# Altium PCB PCB_Trex.PcbDoc
Units mm, origin at the board's own origin, x right, y up, seen from the top; angles counter-clockwise.
Board outline 107.32 x 64.64 mm, 2 copper layers (Top Layer, Bottom Layer); 10 components, 6 nets, 107 pads, 0 vias.
Unrouted connection lines stored in the file: 19.
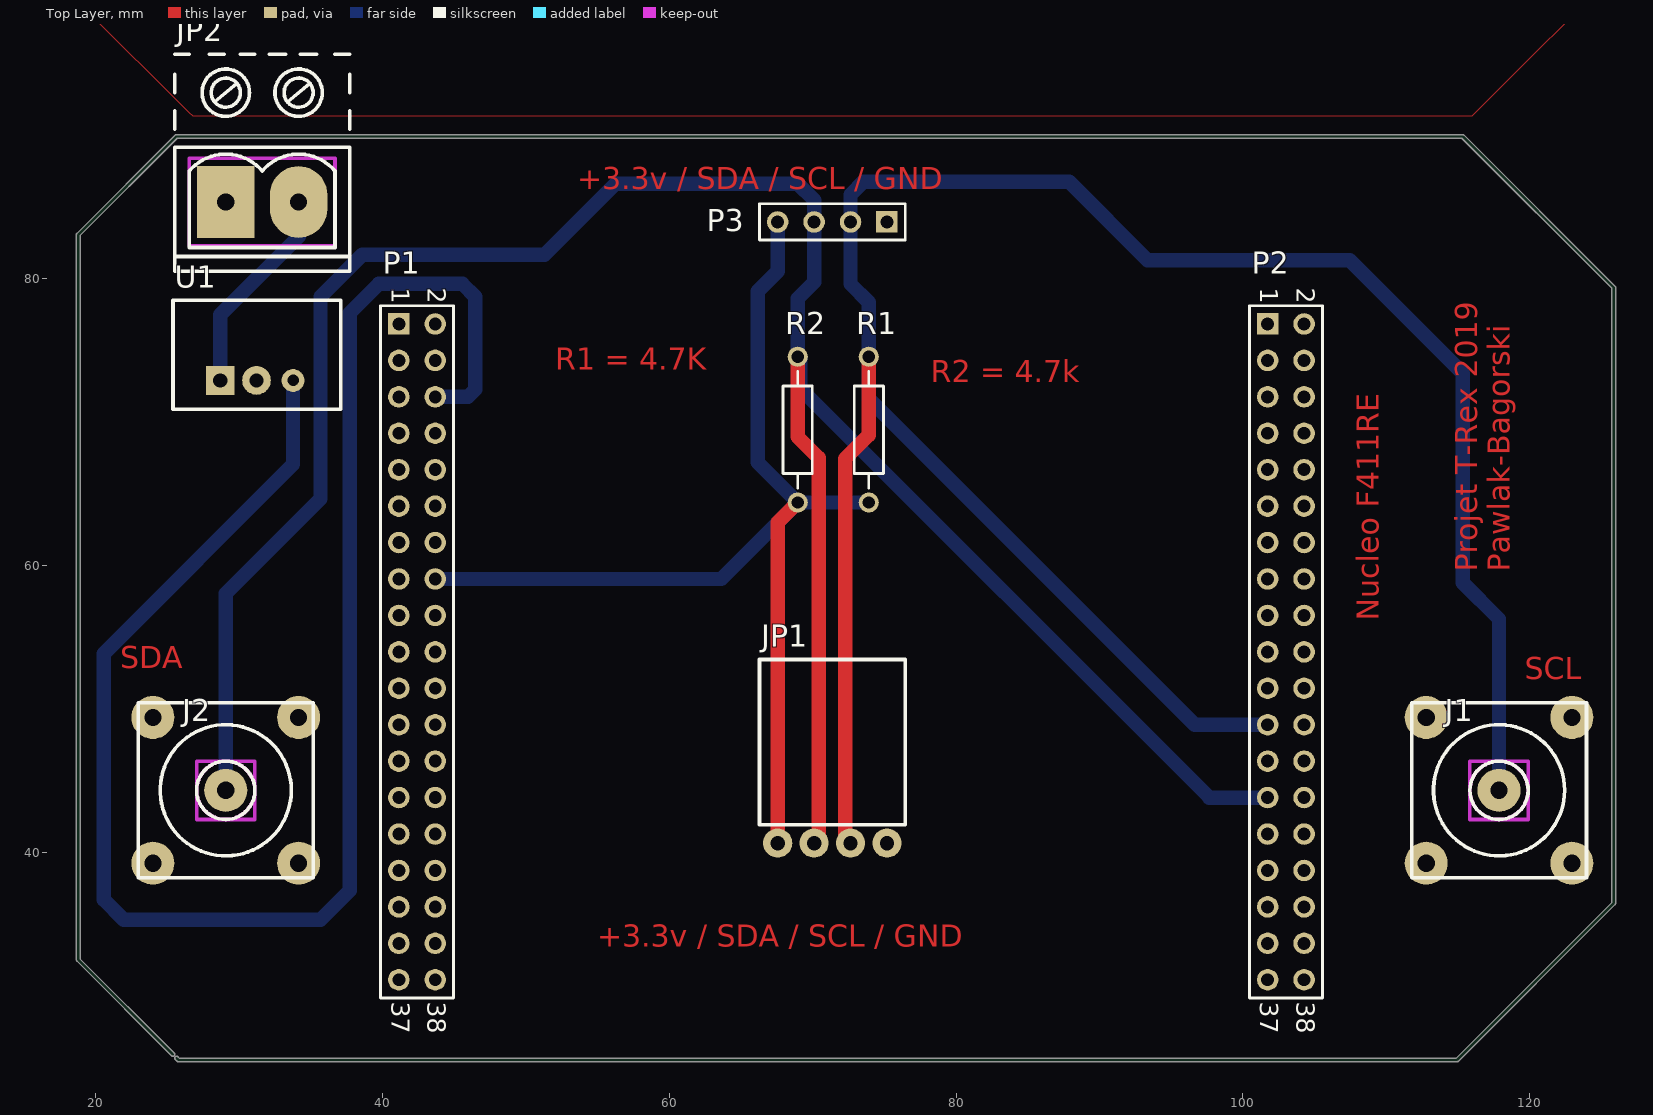
[diagram p0: Top Layer view]
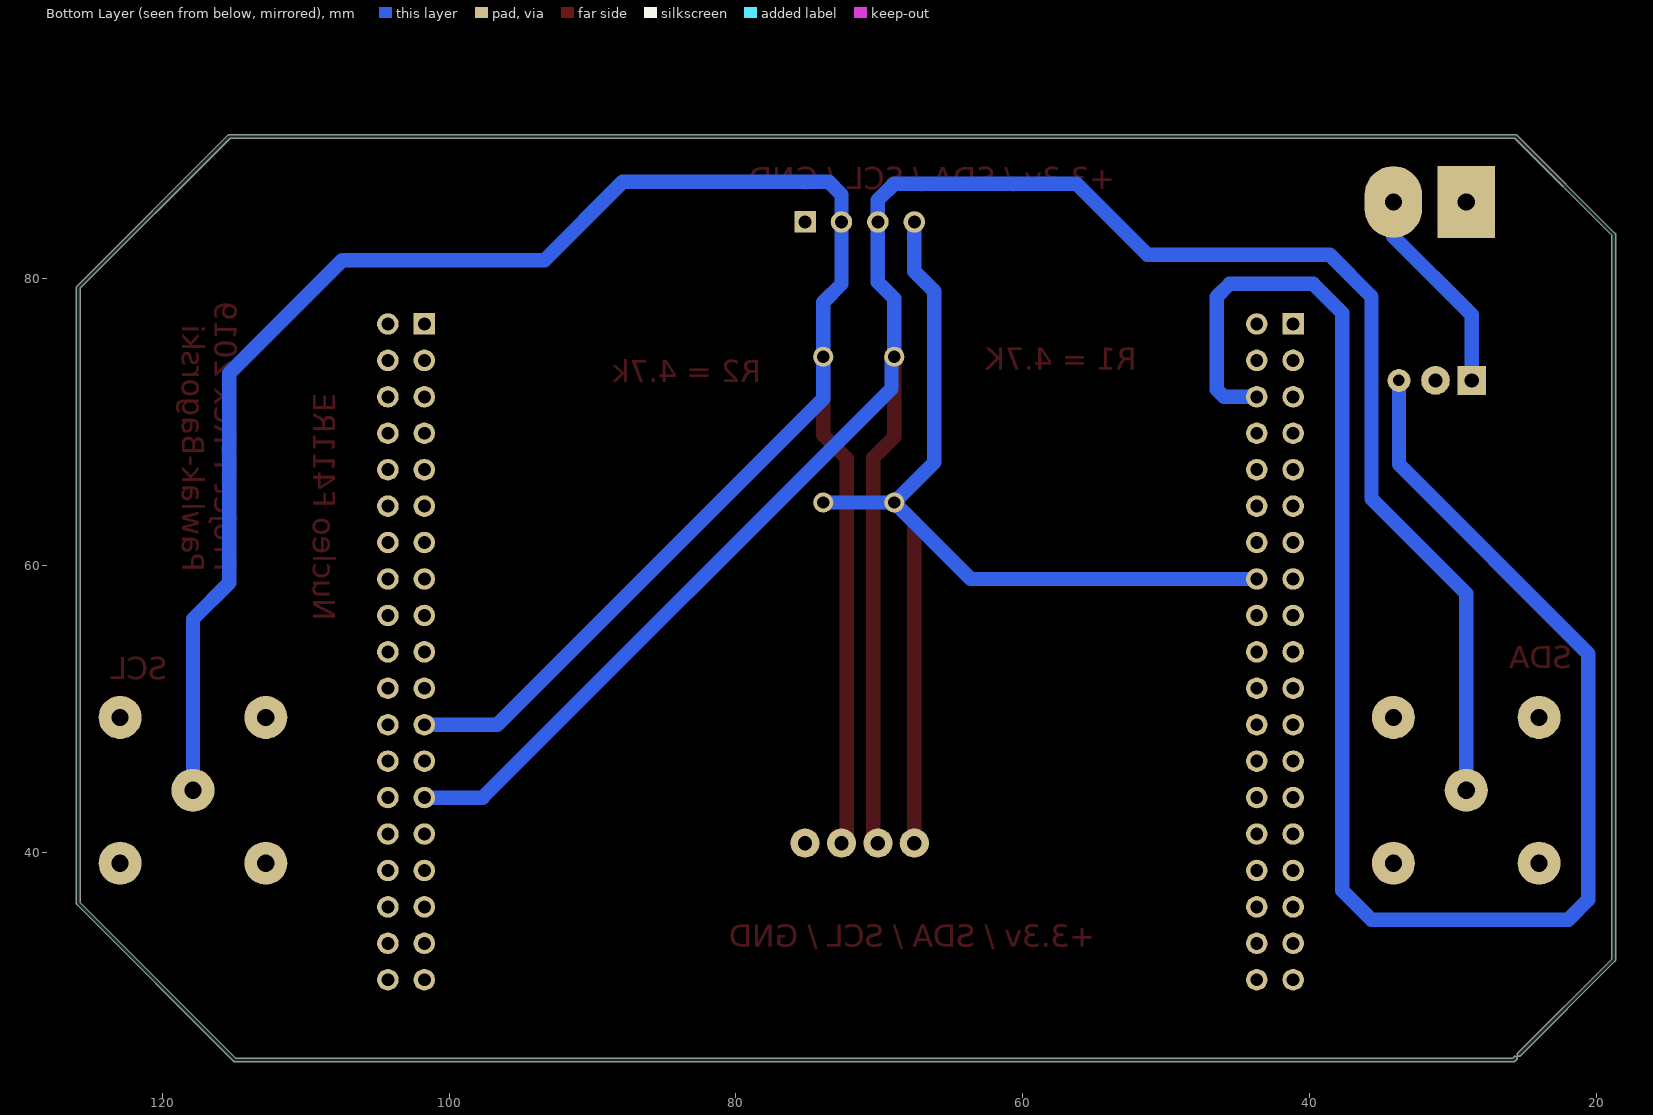
[diagram p1: Bottom Layer view, seen from below]

## Layer stack, top to bottom
Top Solder: solder mask 0.0102, Solder Resist, Dk 3.5
Top Layer: signal copper 0.0356
Dielectric 1: dielectric 0.32, FR-4, Dk 4.8
Bottom Layer: signal copper 0.0356
Bottom Solder: solder mask 0.0102, Solder Resist, Dk 3.5

## Board outline
25.31,25.818 18.706,32.422 18.706,32.421 cw(c18.796,32.512) 18.669,32.512 18.669,83.058 cw(c18.796,83.058) 18.706,83.149 18.706,83.148 25.564,90.006 25.563,90.006 cw(c25.654,89.916) 25.654,90.043 115.316,90.043 cw(c115.316,89.916) 115.407,90.006 115.406,90.006 125.947,79.465 125.947,79.466 cw(c125.857,79.375) 125.984,79.375 125.984,36.449 cw(c125.857,36.449) 125.947,36.358 125.947,36.359 115.025,25.437 115.026,25.437 cw(c114.935,25.527) 114.935,25.4 25.781,25.4 cw(c25.781,25.527) 25.69,25.437 25.691,25.437 25.564,25.564 cw(c25.654,25.654) 25.744,25.744 25.834,25.654 114.882,25.654 125.73,36.502 125.73,79.322 115.263,89.789 25.707,89.789 18.923,83.005 18.923,32.565 25.49,25.998 cw(c25.4,25.908) 25.527,25.908 cw(c25.4,25.908)

## Design rules (kind name [scope] priority, off if disabled: settings)
Clearance [All] p1: gap=0.254
PolygonConnect [All] p1: connectstyle=Relief reliefconductorwidth=0.254 reliefentries=4 polygonreliefangle="90 Angle" airgapwidth=0.254
RoutingVias [All] p1: holewidth=0.711 width=1.27 viastyle="Through Hole" minholewidth=0.711 minwidth=1.27 maxholewidth=0.711 maxwidth=1.27
SolderMaskExpansion [All] p1: expansion=0.102
Width [All] p1: maxlimit=1.27 minlimit=0.254 preferedwidth=1
30 further rules are at their usual default settings.

## Components (designator, comment, footprint, x,y, rotation, side; value= is the part's Value field where it differs from the comment)
J1 "ES" BNC 117.856,44.323 r90 top
J2 "ES" BNC 29.083,44.323 r270 top
JP1 "Connecteur Autocom 4pts" "Autocom HE14 - 4 - Coudé" 67.564,40.64 r90 top
JP2 "Connecteur alim 2 pts" "entrelec 2 PTS" 29.083,85.344 r0 top
P1 "Header 19X2" HDR2X19 41.148,76.835 r270 top
P2 "Header 19X2" HDR2X19 101.727,76.835 r270 top
P3 "Header 4" HDR1X4 75.184,83.947 r180 top
R1 "4.7K" AXIAL-0.4 73.914,69.469 r270 top
R2 "4.7K" AXIAL-0.4 68.961,69.469 r270 top
U1 "TSR 1-2450" TSR-1 28.702,72.898 r0 top

## Footprints (in the part's own frame and the unit in brackets; to place one, negate y for a bottom-side part, rotate by r counter-clockwise, add the part's x,y. Pads: shape width x height; smd on the part's side, far side on the other; paste and mask are expansions set on the pad)
"Autocom HE14 - 4 - Coudé" [mil] "Connecteur 4 points Autocom HE14 - coudé"
  round 80 hole 39.37: 1(0,0) 2(0,-100) 3(0,-200) 4(0,-300)
  silkscreen extent 50,-350 504,50, body extent -12,-350 504,50, height 198
AXIAL-0.4 [mm] "Axial Device, Thru-Hole; 2 Leads; 0.4 in Pin Spacing"
  round 1.4 hole 0.85: 1(-5.08,0) 2(5.08,0)
  silkscreen extent -4.06,-1.02 4.06,1.02
BNC [mm]
  round 3 hole 1.2: 1(0,0) 2(-5.08,-5.08) 2(-5.08,5.08) 2(5.08,-5.08) 2(5.08,5.08)
  Top Layer keep-out circle w0.254: c0,0 r2.032
  Top Layer keep-out lines w0.254: -2.032,2.032 2.032,2.032 2.032,-2.032 -2.032,-2.032 -2.032,2.032
  silkscreen extent -6.1,-6.1 6.1,6.1
"entrelec 2 PTS" [mm]
  rect 4x5 hole 1.2: 1(0,0)
  oval 4x5 hole 1.2: 2(5.08,0)
  Top Layer keep-out lines w0.254: -2.54,-3.048 -2.54,3.048 7.62,3.048 7.62,-3.048 -2.54,-3.048
  silkscreen extent -3.56,-4.83 8.64,10.29
HDR1X4 [mm] "Connector; Header; 4 Position"
  rect 1.5x1.5 hole 0.9: 1(0,0)
  round 1.5 hole 0.9: 2(2.54,0) 3(5.08,0) 4(7.62,0)
  silkscreen extent -1.27,-1.27 8.89,1.27
HDR2X19 [mm] "Connector; Header; 19x2 Position"
  rect 1.5x1.5 hole 0.9: 1(0,0)
  round 1.5 hole 0.9: 2(0,2.54) 3(2.54,0) 4(2.54,2.54) 5(5.08,0) 6(5.08,2.54) 7(7.62,0) 8(7.62,2.54) 9(10.16,0) 10(10.16,2.54) 11(12.7,0) 12(12.7,2.54) 13(15.24,0) 14(15.24,2.54) 15(17.78,0) 16(17.78,2.54) 17(20.32,0) 18(20.32,2.54) 19(22.86,0) 20(22.86,2.54) 21(25.4,0) 22(25.4,2.54) 23(27.94,0) 24(27.94,2.54) 25(30.48,0) 26(30.48,2.54) 27(33.02,0) 28(33.02,2.54) 29(35.56,0) 30(35.56,2.54) 31(38.1,0) 32(38.1,2.54) 33(40.64,0) 34(40.64,2.54) 35(43.18,0) 36(43.18,2.54) 37(45.72,0) 38(45.72,2.54)
  silkscreen extent -1.27,-1.27 46.99,3.81
TSR-1 [mm] "DC/DC Converters  TSR-1 Series - Footprint"
  rect 2x2 hole 1: 1(0,0)
  round 2 hole 1: 2(2.525,0)
  round 1.6 hole 0.8: 3(5.075,0)
  silkscreen extent -3.3,-2 8.4,5.6, body extent -3.32,-1.99 8.38,5.63, height 10.2

## Part data
J1 J2: library part BNC
JP1: library part "Connecteur Autocom 4 pts", "connecteur autocom HE14 4 pts"
P1 P2: "Header, 19-Pin, Dual row"
P3: "Header, 4-Pin"
R1 R2: library part Res2, "Resistor"
U1: "DC/DC Converters  TSR-1 Series, 1 A"

## Free pads (board coordinates)
  round 1.524 hole 3: 7(96.139,84.328) 8(48.641,84.328) 9(34.417,31.75) 10(111.887,31.75)

## Nets (pads, with @x,y where several pads share a name; then routed paths per layer and width w, separated by ;. In a path a pad name is that pad's centre, name@x,y a point inside that pad or via, vN(x,y) a via of type N, cw(c..) or ccw(c..) an arc to the next point about the centre after c; other vN are vias at no path point)
5V: P1.6 U1.3 | length 119.9
  Bottom Layer w1: U1.3 33.777,67.051 20.574,53.848 20.574,36.703 21.971,35.306 35.687,35.306 37.719,37.338 37.719,77.597 39.751,79.629 45.593,79.629 46.482,78.74 46.482,72.263 45.974,71.755 P1.6
GND: J1.2 J2.2 JP1.4 JP2.1 P1.8 P1.19 P1.20 P1.22 P2.9 P2.20 P3.1 pad.9 pad.10 U1.2
NetJP2_2: JP2.2 U1.1 | length 14.7
  Bottom Layer w1: U1.1 28.702,77.47 34.163,82.931 JP2.2
SCL: J1.1 JP1.3 P2.23 P3.2 R1.1 | length 165.7
  Top Layer w1: JP1.3 72.263,40.64 72.263,67.437 73.914,69.088 R1.1
  Bottom Layer w1: P2.23 96.647,48.895 73.914,71.628 R1.1 73.914,78.359 72.644,79.629 P3.2 72.644,85.852 73.533,86.741 87.884,86.741 93.345,81.28 107.442,81.28 115.316,73.406 115.316,69.755 115.316,64.278 115.316,58.801 117.856,56.261 J1.1
SDA: J2.1 JP1.2 P2.27 P3.3 R2.1 | length 168
  Top Layer w1: R2.1 68.961,68.961 70.415,67.507 70.415,40.951 JP1.2
  Bottom Layer w1: J2.1 29.083,58.039 35.687,64.643 35.687,78.74 38.608,81.661 51.308,81.661 56.261,86.614 68.961,86.614 70.104,85.471 P3.3 70.104,79.756 68.961,78.613 R2.1 69.151,74.358 69.151,72.326 97.663,43.815 P2.27
VCC: JP1.1 P1.16 P3.4 R1.2 R2.2 | length 78.1
  Top Layer w1: JP1.1 67.564,62.992 R2.2
  Bottom Layer w1: P1.16 63.627,59.055 R2.2 ; P3.4 67.564,80.518 66.167,79.121 66.167,67.183 66.865,66.484 68.263,65.087 R2.2 ; R1.2 R2.2
pads on no net: P1.1 P1.2 P1.3 P1.4 P1.5 P1.7 P1.9 P1.10 P1.11 P1.12 P1.13 P1.14 P1.15 P1.17 P1.18 P1.21 P1.23 P1.24 P1.25 P1.26 P1.27 P1.28 P1.29 P1.30 P1.31 P1.32 P1.33 P1.34 P1.35 P1.36 P1.37 P1.38 P2.1 P2.2 P2.3 P2.4 P2.5 P2.6 P2.7 P2.8 P2.10 P2.11 P2.12 P2.13 P2.14 P2.15 P2.16 P2.17 P2.18 P2.19 P2.21 P2.22 P2.24 P2.25 P2.26 P2.28 P2.29 P2.30 P2.31 P2.32 P2.33 P2.34 P2.35 P2.36 P2.37 P2.38

## Polygon pours and split planes (outlines as drawn)
GND on Top Layer "Mechanical 1-No Net" (solid, remove dead copper, pour order 14): 19.304,98.806 19.304,148.971 26.717,156.384 72.464,156.771 116.089,156.771 126.947,145.912 126.947,102.288 115.962,91.302 26.808,91.302 26.554,91.556
GND on Bottom Layer "Mechanical 1-No Net" (solid, remove dead copper, pour order 12): 129.188,81.962 136.717,89.492 183.508,89.491 225.862,89.491 236.721,78.633 236.721,36.278 225.617,25.166 136.717,25.166 129.188,32.695

## Other copper
Top Layer:
  text "+3.3v / SDA / SCL / GND" at 53.594,86.233 h1.52
  text "R1 = 4.7K" at 52.07,73.66 h1.52
  text "R2 = 4.7k" at 78.232,72.771 h1.52
  text "Projet T-Rex 2019 / Pawlak-Bagorski" at 118.618,59.563 h1.52 r90
  text "Nucleo F411RE" at 109.474,56.134 h1.52 r90
  text "SDA" at 21.717,52.832 h1.52
  text "SCL" at 119.634,52.07 h1.52
  text "+3.3v / SDA / SCL / GND" at 54.991,33.401 h1.52

## Silkscreen, mask and mechanical layers (free items; w line width, h text height)
Mechanical 1:
  lines w0.254: 25.4,25.908 18.796,32.512 18.796,83.058 25.654,89.916 115.316,89.916 125.857,79.375 125.857,36.449 114.935,25.527 25.781,25.527 25.654,25.654

## Dimensions
43.688,76.835 to 101.727,76.835 on Mechanical 3
73.914,64.389 to 68.961,64.389 on Mechanical 3
68.961,64.389 to 67.564,83.947 on Mechanical 3
73.914,64.389 to 75.184,83.947 on Mechanical 3

## Text inside footprints (layer, text, board x,y; h text height)
P1: Top Overlay "38" at 43.18,29.591 h1.27 r270; Top Overlay "37" at 40.64,29.591 h1.27 r270; Top Overlay "1" at 40.64,79.375 h1.27 r270; Top Overlay "2" at 43.18,79.375 h1.27 r270
P2: Top Overlay "38" at 103.759,29.591 h1.27 r270; Top Overlay "37" at 101.219,29.591 h1.27 r270; Top Overlay "1" at 101.219,79.375 h1.27 r270; Top Overlay "2" at 103.759,79.375 h1.27 r270